# Altium PCB SmartSequins9.1.PcbDoc
Units mm, origin at the board's own origin, x right, y up, seen from the top; angles counter-clockwise.
Board outline 25.01 x 25.01 mm, 2 copper layers (Top Layer, Bottom Layer); 40 components, 20 nets, 91 pads, 36 vias.
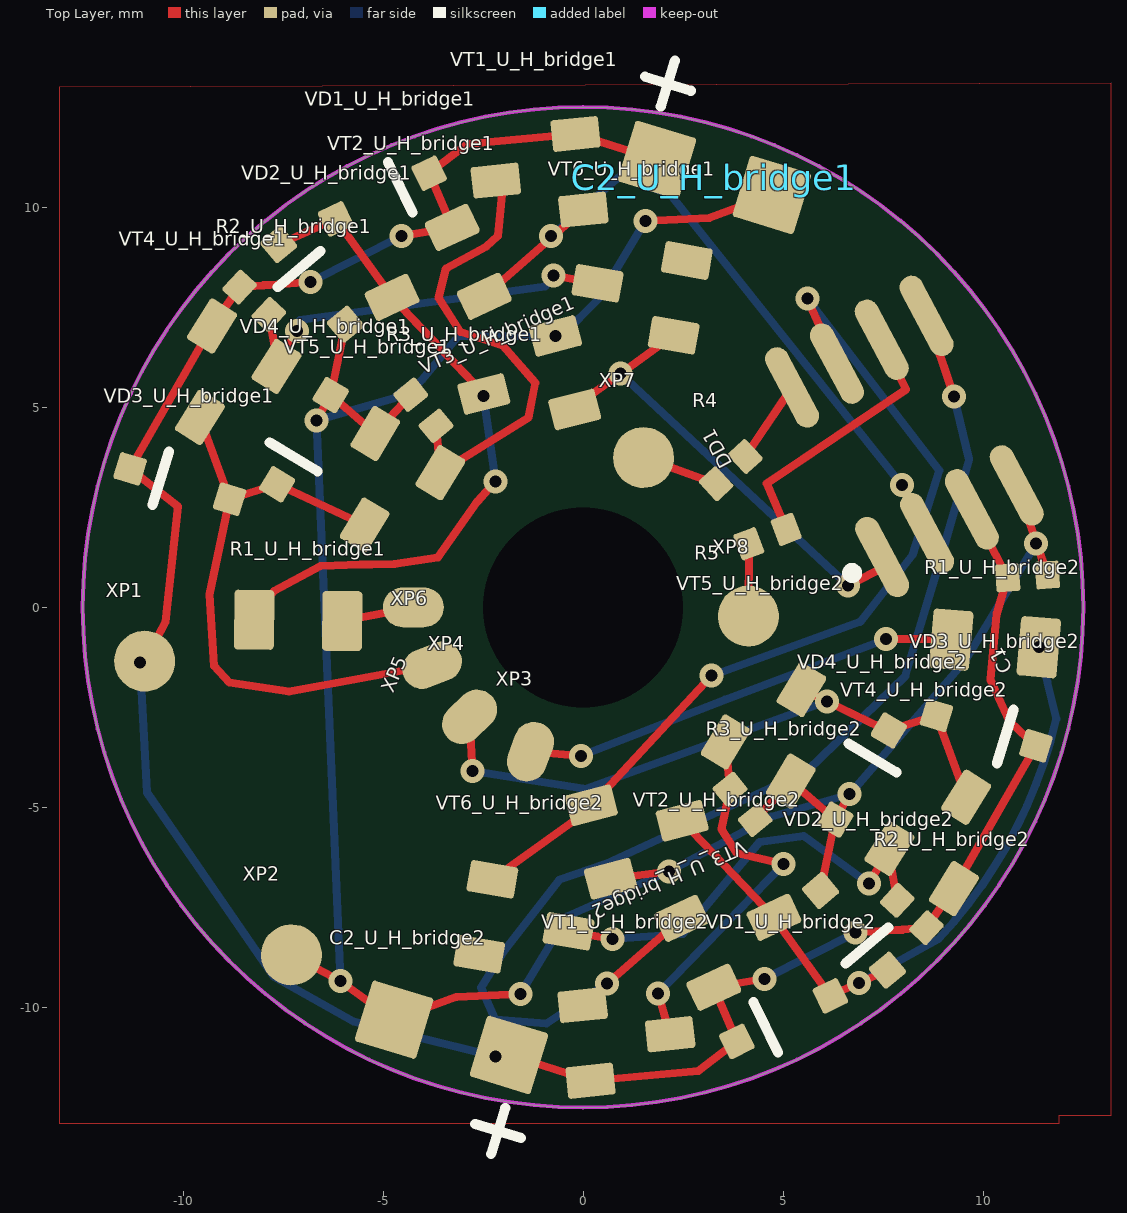
[diagram p0: Top Layer view]
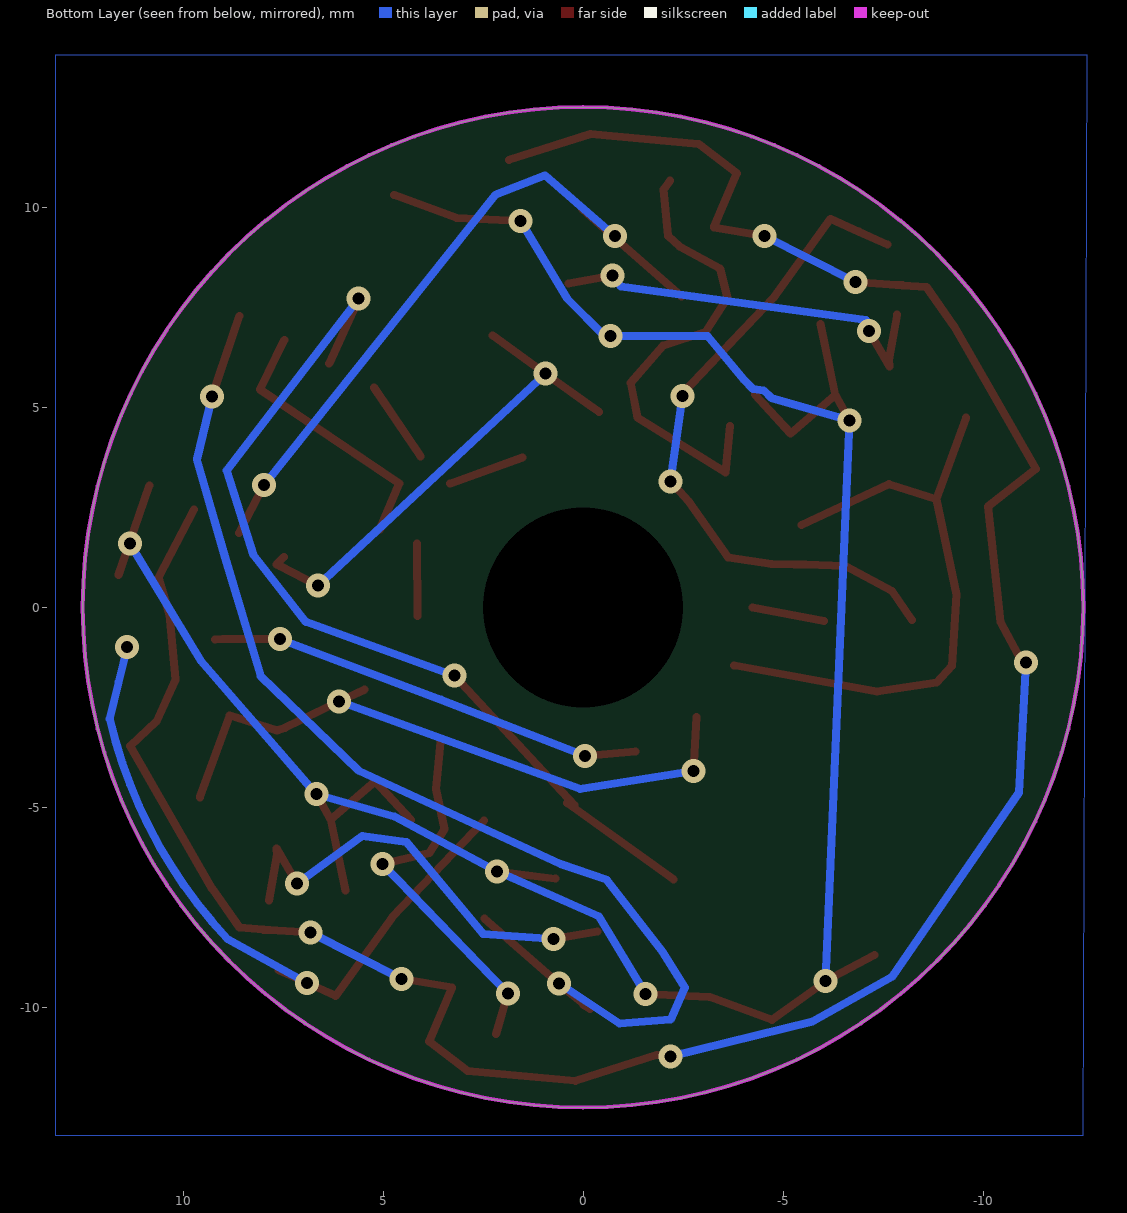
[diagram p1: Bottom Layer view, seen from below]
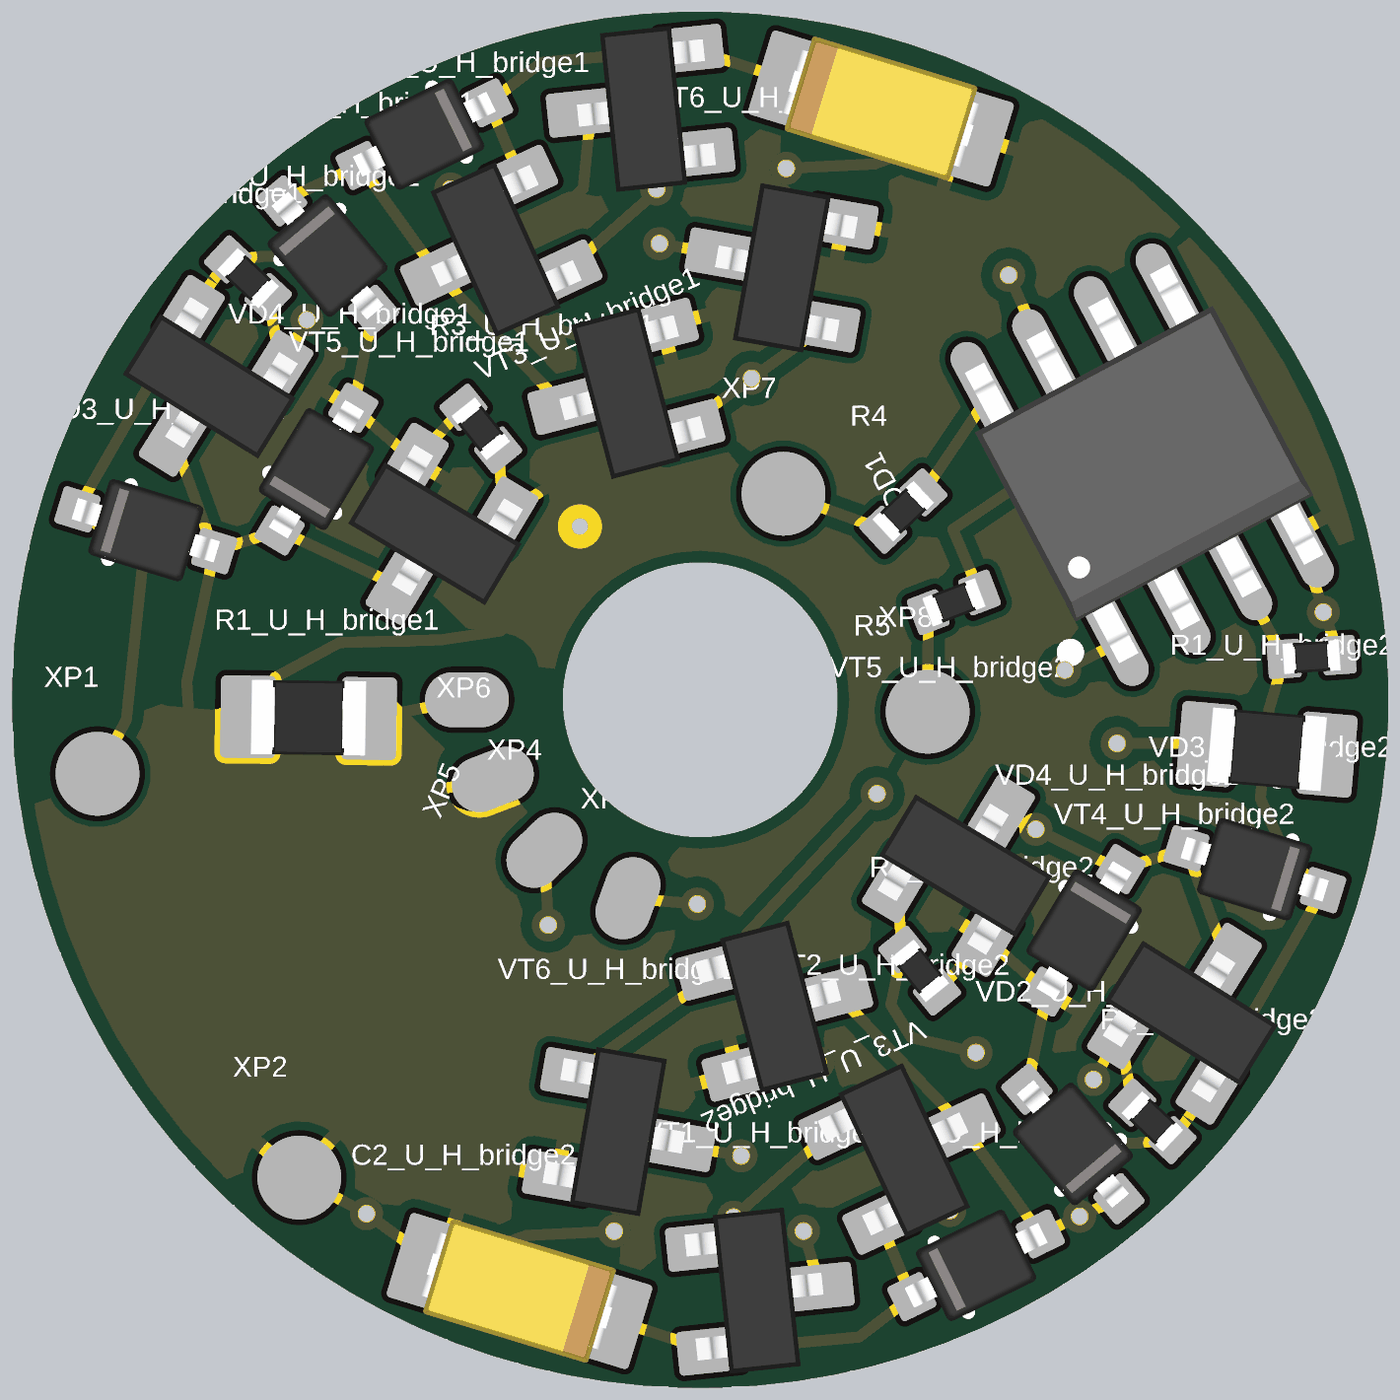
[diagram p2: 3D render of the assembled board from above, using the file's embedded part models]

## Layer stack, top to bottom
Top Solder: solder mask 0.0102, Solder Resist, Dk 3.5
Top Layer: signal copper 0.0356
Dielectric 1: dielectric 0.32, FR-4, Dk 4.8
Bottom Layer: signal copper 0.0356
Bottom Solder: solder mask 0.0102, Solder Resist, Dk 3.5

## Board outline
-12.507,0 ccw(c0,0) 0,-12.507 ccw(c0,0) 12.507,0 ccw(c0,0) 0,12.507 ccw(c0,0)

## Design rules (kind name [scope] priority, off if disabled: settings)
Clearance [All] p1: gap=0.2 ignorepadtopadclearanceinfootprint=FALSE
PolygonConnect [All] p1: thpad.connectstyle=Relief thpad.reliefconductorwidth=0.254 thpad.reliefentries=4 thpad.polygonreliefangle="90 Angle" thpad.airgapwidth=0.254 smdpad.connectstyle=Relief smdpad.reliefconductorwidth=0.254 smdpad.reliefentries=4 smdpad.polygonreliefangle="90 Angle" smdpad.airgapwidth=0.254 via.connectstyle=Direct via.reliefconductorwidth=0.254 via.reliefentries=4 via.polygonreliefangle="90 Angle" via.airgapwidth=0.254
RoutingVias [All] p1: holewidth=0.3 width=0.6 viastyle="Through Hole" minholewidth=0.3 minwidth=0.6 maxholewidth=0.3 maxwidth=0.6
SolderMaskExpansion [All] p1: expansion=0.102 istentingtop=FALSE
Width [All] p1: maxlimit=0.2 minlimit=0.2 preferedwidth=0.2
30 further rules are at their usual default settings.

## Classes and differential pairs
channel class H_bridge: U_H_bridge1 U_H_bridge2
component class U_MCU: C1 DD1 R4 R5 XP7 XP8
component class U_H_bridge2: C2_U_H_bridge2 R1_U_H_bridge2 R2_U_H_bridge2 R3_U_H_bridge2 VD1_U_H_bridge2 VD2_U_H_bridge2 VD3_U_H_bridge2 VD4_U_H_bridge2 VT1_U_H_bridge2 VT2_U_H_bridge2 VT3_U_H_bridge2 VT4_U_H_bridge2 VT5_U_H_bridge2 VT6_U_H_bridge2
component class U_H_bridge1: C2_U_H_bridge1 R1_U_H_bridge1 R2_U_H_bridge1 R3_U_H_bridge1 VD1_U_H_bridge1 VD2_U_H_bridge1 VD3_U_H_bridge1 VD4_U_H_bridge1 VT1_U_H_bridge1 VT2_U_H_bridge1 VT3_U_H_bridge1 VT4_U_H_bridge1 VT5_U_H_bridge1 VT6_U_H_bridge1
component class SmartSequins9.1: XP1 XP2 XP3 XP4 XP5 XP6

## Components (designator, comment, footprint, x,y, rotation, side; value= is the part's Value field where it differs from the comment)
C1 "0,1uF" SMD0402(1608) 11.113,0.777 r4 top
C2_U_H_bridge1 "10uF x 10V" TANT_CAP_A(3216) 3.286,10.749 r343 top (schematic designator C2)
C2_U_H_bridge2 "10uF x 10V" TANT_CAP_A(3216) -3.286,-10.749 r163 top (schematic designator C2)
DD1 "PFC161-S08B" SOIC8 8.07,4.291 r118 top
R1_U_H_bridge1 "10" SMD0805(2012) -7.121,-0.325 r179.21 top (schematic designator R1)
R1_U_H_bridge2 "10" SMD0805(2012) 10.301,-0.901 r355 top (schematic designator R1)
R2_U_H_bridge1 "20к" SMD0402(1608) -8.22,7.666 r317 top (schematic designator R2)
R2_U_H_bridge2 "20к" SMD0402(1608) 8.22,-7.666 r137 top (schematic designator R2)
R3_U_H_bridge1 "20к" SMD0402(1608) -3.99,4.927 r129 top (schematic designator R3)
R3_U_H_bridge2 "20к" SMD0402(1608) 3.99,-4.927 r309 top (schematic designator R3)
R4 "200" SMD0402(1608) 3.692,3.431 r222.9 top
R5 "200" SMD0402(1608) 4.612,1.77 r201 top
VD1_U_H_bridge1 "Value" SOD323 -5.015,10.282 r26 top (schematic designator VD1)
VD1_U_H_bridge2 "Value" SOD323 5.015,-10.282 r206 top (schematic designator VD1)
VD2_U_H_bridge1 "Value" SOD323 -6.775,8.074 r130 top (schematic designator VD2)
VD2_U_H_bridge2 "Value" SOD323 6.775,-8.074 r310 top (schematic designator VD2)
VD3_U_H_bridge1 "Value" SOD323 -10.079,3.082 r163 top (schematic designator VD3)
VD3_U_H_bridge2 "Value" SOD323 10.079,-3.082 r343 top (schematic designator VD3)
VD4_U_H_bridge1 "Value" SOD323 -6.977,4.192 r239 top (schematic designator VD4)
VD4_U_H_bridge2 "Value" SOD323 6.977,-4.192 r59 top (schematic designator VD4)
VT1_U_H_bridge1 "IRLML2244TRPBF" SOT23-3 -1.133,10.781 r186 top (schematic designator VT1)
VT1_U_H_bridge2 "IRLML2244TRPBF" SOT23-3 1.133,-10.781 r6 top (schematic designator VT1)
VT2_U_H_bridge1 "IRLML2244TRPBF" SOT23-3 -3.82,8.193 r205 top (schematic designator VT2)
VT2_U_H_bridge2 "IRLML2244TRPBF" SOT23-3 3.82,-8.193 r25 top (schematic designator VT2)
VT3_U_H_bridge1 "IRLML0040TRPBF" SOT23-3 -1.464,5.6 r194.65 top (schematic designator VT3)
VT3_U_H_bridge2 "IRLML0040TRPBF" SOT23-3 1.464,-5.6 r14.65 top (schematic designator VT3)
VT4_U_H_bridge1 "IRLML2244TRPBF" SOT23-3 -9.023,5.638 r238 top (schematic designator VT4)
VT4_U_H_bridge2 "IRLML2244TRPBF" SOT23-3 9.023,-5.638 r58 top (schematic designator VT4)
VT5_U_H_bridge1 "IRLML0040TRPBF" SOT23-3 -4.92,2.956 r239 top (schematic designator VT5)
VT5_U_H_bridge2 "IRLML0040TRPBF" SOT23-3 4.92,-2.956 r59 top (schematic designator VT5)
VT6_U_H_bridge1 "IRLML0040TRPBF" SOT23-3 1.396,7.918 r170 top (schematic designator VT6)
VT6_U_H_bridge2 "IRLML0040TRPBF" SOT23-3 -1.396,-7.918 r350 top (schematic designator VT6)
XP1 "+5V" XP_solder#1 -10.958,-1.345 r187 top
XP2 "GND" XP_solder#1 -7.289,-8.687 r320 top
XP3 "A+" XP_solder#2 -1.313,-3.608 r70 top
XP4 "A-" XP_solder#2 -2.834,-2.737 r44 top
XP5 "B+" XP_solder#2 -4.24,0 r0 top
XP6 "B-" XP_solder#2 -3.772,-1.448 r21 top
XP7 "IN" XP_solder#1 1.513,3.746 r158 top
XP8 "OUT" XP_solder#1 4.134,-0.217 r87 top

## Footprints (in the part's own frame and the unit in brackets; to place one, negate y for a bottom-side part, rotate by r counter-clockwise, add the part's x,y. Pads: shape width x height; smd on the part's side, far side on the other; paste and mask are expansions set on the pad)
SMD0402(1608) [mm] "Chip Resistor, Body 0.6x0.3mm, IPC Medium Density"
  rrect20% 0.6x0.7 smd: 1(-0.5,0) 2(0.5,0)
  body extent -0.52,-0.27 0.53,0.27, height 0.4
SMD0805(2012) [mm] "Chip Resistor, Body 0.6x0.3mm, IPC Medium Density"
  rrect20% 1x1.5 smd: 1(-1.1,0) 2(1.1,0)
  body extent -1.05,-0.68 1.05,0.67, height 0.6
SOD323 [mm] "Chip Resistor, Body 0.6x0.3mm, IPC Medium Density"
  rrect20% 0.7x0.7 smd: 1(-1.3,0) 2(1.3,0)
  silkscreen extent 0.5,-0.7 0.5,0.7, body extent -1.35,-0.72 1.35,0.73, height 1.15
SOIC8 [mm]
  oval 2.2x0.6 smd: 1(-2.4,1.945) 2(-2.4,0.675) 3(-2.4,-0.595) 4(-2.4,-1.865) 5(2.4,-1.865) 6(2.4,-0.595) 7(2.4,0.675) 8(2.4,1.945)
  silkscreen extent -2.52,2.67 -2.27,2.92, body extent -2.99,-2.45 2.99,2.45, height 1.35
SOT23-3 [mm]
  rrect20% 1.2x0.8 smd: 1(-1.05,0.95) 2(-1.05,-0.95) 3(1.05,0)
  body extent -1.3,-1.4 1.1,1.5, height 1
TANT_CAP_A(3216) [mm]
  rrect10% 1.6x1.6 smd: 1(-1.5,0) 2(1.5,0)
  silkscreen extent -2.4,1.3 -1.2,2.5, body extent -1.7,-0.9 1.7,0.9, height 1.8
XP_solder#1 [mil]
  round 60 smd: 1(0,0)
XP_solder#2 [mil]
  oval 60x39.37 smd: 1(0,0)

## Part data
C1: Package=SMD0402, ValueBOM="Конденсатор керамический 0,1мкФ х 50В SMD 0402 1%", Type=C
C2_U_H_bridge1 C2_U_H_bridge2: Package="SMD A", ValueBOM="Конденсатор танталовый 10мкФ х 10В SMD A", Type=C
DD1: Package=SOIC-8, ValueBOM="Микроконтроллер PFC161-S08B, SOIC-8", Type=DD
R1_U_H_bridge1 R1_U_H_bridge2: Package=SMD0805, ValueBOM="Резистор 10 Ом SMD 0805 1%", Type=R
R2_U_H_bridge1 R2_U_H_bridge2 R3_U_H_bridge1 R3_U_H_bridge2: Package=SMD0402, ValueBOM="Резистор 20кОм SMD 0402 1%", Type=R
R4 R5: Package=SMD0402, ValueBOM="Резистор 200Ом SMD 0402 1%", Type=R
VD1_U_H_bridge1 VD1_U_H_bridge2 VD2_U_H_bridge1 VD2_U_H_bridge2 VD3_U_H_bridge1 VD3_U_H_bridge2 VD4_U_H_bridge1 VD4_U_H_bridge2: Package=SOD323, ValueBOM="Диод Шоттки SOD323", Type=VD
VT1_U_H_bridge1 VT1_U_H_bridge2 VT2_U_H_bridge1 VT2_U_H_bridge2 VT4_U_H_bridge1 VT4_U_H_bridge2: library part VT_P_MOSFET_SOT23_3, Package=SOT-23, ValueBOM="Транзистор p-МОП IRLML2244TRPBF SOT23", Type=VT
VT3_U_H_bridge1 VT3_U_H_bridge2 VT5_U_H_bridge1 VT5_U_H_bridge2 VT6_U_H_bridge1 VT6_U_H_bridge2: library part VT_N_MOSFET_SOT23_3, Package=SOT-23, ValueBOM="Транзистор n-МОП IRLML0040TRPBF SOT23", Type=VT
XP1 XP2 XP3 XP4 XP5 XP6 XP7 XP8: library part XP_solder

## Free pads (board coordinates)
  round 1.524 hole 5 unplated: 18(0,0)

## Via types
v1: diameter 0.6, hole 0.3, Top Layer to Bottom Layer, tented both sides, 34 vias
v2: diameter 0.6, hole 0.3, Top Layer to Bottom Layer, 2 vias

## Nets (pads, with @x,y where several pads share a name; then routed paths per layer and width w, separated by ;. In a path a pad name is that pad's centre, name@x,y a point inside that pad or via, vN(x,y) a via of type N, cw(c..) or ccw(c..) an arc to the next point about the centre after c; other vN are vias at no path point)
GND_B_U_H_bridge1: C1.2 C2_U_H_bridge1.2 C2_U_H_bridge2.2 DD1.4 R3_U_H_bridge1.2 R3_U_H_bridge2.2 VD2_U_H_bridge1.1 VD2_U_H_bridge2.1 VD4_U_H_bridge1.1 VD4_U_H_bridge2.1 VT3_U_H_bridge1.2 VT3_U_H_bridge2.2 VT5_U_H_bridge1.2 VT5_U_H_bridge2.2 VT6_U_H_bridge1.2 VT6_U_H_bridge2.2 XP2.1 | length 66.4
  Top Layer w0.2: XP2.1 v1(-6.067,-9.343) C2_U_H_bridge2.2 -3.164,-9.739 v1(-1.563,-9.661) ; v1(-6.668,4.669) VD4_U_H_bridge1.1 ; VD2_U_H_bridge1.1 VD4_U_H_bridge1.1 ; R3_U_H_bridge1.2 VT5_U_H_bridge1.2 VD4_U_H_bridge1.1 ; VT3_U_H_bridge2.2 v1(2.145,-6.6) ; v1(1.563,9.661) 3.164,9.739 C2_U_H_bridge1.2 ; R3_U_H_bridge2.2 VT5_U_H_bridge2.2 VD4_U_H_bridge2.1 ; VD2_U_H_bridge2.1 VD4_U_H_bridge2.1 ; v1(6.668,-4.669) VD4_U_H_bridge2.1 ; DD1.4 11.342,1.597 C1.2
  Bottom Layer w0.2: v1(-6.067,-9.343) v1(-6.668,4.669) -4.711,5.232 -4.517,5.426 -4.252,5.462 -4.017,5.696 -3.111,6.785 v1(-0.688,6.785) -0.54,6.785 0.405,7.729 v1(1.563,9.661) ; v1(-1.563,-9.661) -0.405,-7.729 v1(2.145,-6.6) 4.711,-5.232 v1(6.668,-4.669) 9.546,-1.342 v1(11.329,1.592)
MCU_VCC: C1.1 C2_U_H_bridge1.1 C2_U_H_bridge2.1 DD1.3 R2_U_H_bridge1.1 R2_U_H_bridge2.1 VD1_U_H_bridge1.2 VD1_U_H_bridge2.2 VD3_U_H_bridge1.2 VD3_U_H_bridge2.2 VT1_U_H_bridge1.2 VT1_U_H_bridge2.2 VT2_U_H_bridge1.2 VT2_U_H_bridge2.2 VT4_U_H_bridge1.2 VT4_U_H_bridge2.2 XP1.1 | length 64.1
  Top Layer w0.2: XP1.1 -10.434,-0.364 -10.13,2.526 VD3_U_H_bridge1.2 VT4_U_H_bridge1.2 R2_U_H_bridge1.1 -7.993,8.049 -7.982,8.06 -7.838,8.06 v1(-6.813,8.134) ; v1(-4.536,9.285) VT2_U_H_bridge1.2 VD1_U_H_bridge1.2 -2.889,11.585 VT1_U_H_bridge1.2 C2_U_H_bridge1.1 ; v1(-2.183,-11.23) C2_U_H_bridge2.1 VT1_U_H_bridge2.2 2.889,-11.585 VD1_U_H_bridge2.2 VT2_U_H_bridge2.2 v1(4.536,-9.285) ; v1(6.813,-8.134) 7.838,-8.06 7.982,-8.06 7.993,-8.049 R2_U_H_bridge2.1 VT4_U_H_bridge2.2 VD3_U_H_bridge2.2 10.664,-2.857 10.183,-1.796 10.338,-0.18 C1.1 DD1.3
  Bottom Layer w0.2: v1(-11.078,-1.384) -10.899,-4.626 -7.739,-9.223 -5.74,-10.355 v1(-2.183,-11.23) ; v1(-6.813,8.134) v1(-4.536,9.285) ; v1(4.536,-9.285) v1(6.813,-8.134)
NetDD1_1: DD1.1 VT3_U_H_bridge1.1 VT6_U_H_bridge1.1 | length 12.5
  Top Layer w0.2: VT3_U_H_bridge1.1@-0.396,4.888 -0.244,4.997 v1(0.934,5.844) VT6_U_H_bridge1.1 ; v1(6.625,0.54) 7.593,1.04 7.665,1.077 DD1.1
  Bottom Layer w0.2: v1(0.934,5.844) v1(6.625,0.54)
NetDD1_2: DD1.2 VT1_U_H_bridge1.1 VT2_U_H_bridge1.1 | length 17.6
  Top Layer w0.2: VT2_U_H_bridge1.1 -0.774,9.259 VT1_U_H_bridge1.1 ; v1(7.973,3.06) DD1.2
  Bottom Layer w0.2: v1(-0.795,9.283) 0.945,10.799 2.191,10.31 v1(7.973,3.06)
NetDD1_5: DD1.5 VT1_U_H_bridge2.1 VT2_U_H_bridge2.1 | length 30.6
  Top Layer w0.2: VT1_U_H_bridge2.1 -0.175,-10.038 -0.03,-9.921 v1(0.605,-9.406) VT2_U_H_bridge2.1 ; DD1.5 v1(9.275,5.266)
  Bottom Layer w0.2: v1(0.605,-9.406) 0.599,-9.4 -0.91,-10.4 -2.191,-10.31 -2.547,-9.505 -1.989,-8.613 -0.596,-6.814 0.561,-6.415 5.615,-4.079 8.06,-1.713 8.952,1.258 9.653,3.706 v1(9.275,5.266)
NetDD1_6: DD1.6 R5.1 | length 6.8
  Top Layer w0.2: R5.1 4.593,3.098 8.075,5.447 DD1.6
NetDD1_7: DD1.7 VT3_U_H_bridge2.1 VT6_U_H_bridge2.1 | length 23.6
  Top Layer w0.2: VT6_U_H_bridge2.1 0.244,-4.997 VT3_U_H_bridge2.1@0.396,-4.888 ; VT3_U_H_bridge2.1 v1(3.214,-1.709) ; v1(5.607,7.718) 5.529,7.897 5.61,7.719 DD1.7
  Bottom Layer w0.2: v1(3.214,-1.709) 6.93,-0.363 8.237,1.305 8.906,3.419 v1(5.607,7.718)
NetDD1_8: DD1.8 R4.1 | length 2.1
  Top Layer w0.2: R4.1 DD1.8
NetR1_U_H_bridge1_1: R1_U_H_bridge1.1 XP5.1 | length 1.8
  Top Layer w0.2: R1_U_H_bridge1.1 XP5.1
NetR1_U_H_bridge1_2: R1_U_H_bridge1.2 VD1_U_H_bridge1.1 VD2_U_H_bridge1.2 VT2_U_H_bridge1.3 VT3_U_H_bridge1.3 | length 17
  Top Layer w0.2: R1_U_H_bridge1.2 -7.729,0.405 -6.558,1.039 -5.56,1.066 -5.297,1.066 -5.29,1.073 -4.716,1.089 -3.631,1.25 -2.645,2.645 v2(-2.188,3.15) ; VD2_U_H_bridge1.2 -6.897,9.391 VD1_U_H_bridge1.1 VT2_U_H_bridge1.3 VT3_U_H_bridge1.3
  Bottom Layer w0.2: v2(-2.491,5.285) v2(-2.188,3.15)
NetR1_U_H_bridge2_1: R1_U_H_bridge2.1 XP3.1 | length 11.1
  Top Layer w0.2: XP3.1 v1(-0.053,-3.713) ; v1(7.579,-0.794) 9.006,-0.788 R1_U_H_bridge2.1
  Bottom Layer w0.2: v1(-0.053,-3.713) 3.556,-2.309 v1(7.579,-0.794)
NetR1_U_H_bridge2_2: R1_U_H_bridge2.2 VD1_U_H_bridge2.1 VD2_U_H_bridge2.2 VT2_U_H_bridge2.3 VT3_U_H_bridge2.3 | length 17.7
  Top Layer w0.2: VT3_U_H_bridge2.3 VT2_U_H_bridge2.3 VD1_U_H_bridge2.1 v1(6.897,-9.391) VD2_U_H_bridge2.2
  Bottom Layer w0.2: v1(6.897,-9.391) 8.891,-8.291 ccw(c0,0) 11.834,-2.786 11.608,-1.864 v1(11.396,-0.997)
NetR2_U_H_bridge1_2: R2_U_H_bridge1.2 VT4_U_H_bridge1.1 VT6_U_H_bridge1.3 | length 10.3
  Top Layer w0.2: R2_U_H_bridge1.2 -7.647,6.193 VT4_U_H_bridge1.1 v1(-7.15,6.905) ; v1(-0.742,8.292) VT6_U_H_bridge1.3
  Bottom Layer w0.2: v1(-7.15,6.905) -7.058,7.026 -7.08,7.182 -0.947,8.022 v1(-0.742,8.292)
NetR2_U_H_bridge2_2: R2_U_H_bridge2.2 VT4_U_H_bridge2.1 VT6_U_H_bridge2.3 | length 11.3
  Top Layer w0.2: VT6_U_H_bridge2.3 v1(0.742,-8.292) ; v1(7.15,-6.905) VT4_U_H_bridge2.1 7.647,-6.193 R2_U_H_bridge2.2
  Bottom Layer w0.2: v1(0.742,-8.292) 2.497,-8.167 4.417,-5.862 5.516,-5.712 v1(7.15,-6.905)
NetR3_U_H_bridge1_1: R3_U_H_bridge1.1 VT1_U_H_bridge1.3 VT5_U_H_bridge1.1 | length 11.8
  Top Layer w0.2: R3_U_H_bridge1.1 VT5_U_H_bridge1.1 -1.362,4.749 -1.193,5.615 -2,6.541 -3.067,6.888 -3.609,7.74 -3.424,8.474 -2.417,9.022 -2.128,9.288 -2.015,10.448 VT1_U_H_bridge1.3
NetR3_U_H_bridge2_1: R3_U_H_bridge2.1 VT1_U_H_bridge2.3 VT5_U_H_bridge2.1 | length 9.7
  Top Layer w0.2: v1(1.878,-9.659) VT1_U_H_bridge2.3 ; VT5_U_H_bridge2.1 R3_U_H_bridge2.1 3.466,-5.546 3.837,-6.14 v1(5.011,-6.414)
  Bottom Layer w0.2: v1(1.878,-9.659) v1(5.011,-6.414)
NetR4_2: R4.2 XP7.1 | length 1.9
  Top Layer w0.2: XP7.1 R4.2
NetR5_2: R5.2 XP8.1 | length 1.8
  Top Layer w0.2: XP8.1 R5.2
NetVD3_U_H_bridge1_1: VD3_U_H_bridge1.1 VD4_U_H_bridge1.2 VT4_U_H_bridge1.3 VT5_U_H_bridge1.3 XP6.1 | length 15.8
  Top Layer w0.2: VT4_U_H_bridge1.3 VD3_U_H_bridge1.1 ; VT5_U_H_bridge1.3 VD4_U_H_bridge1.2 VD3_U_H_bridge1.1 ; XP6.1 -7.344,-2.106 -8.842,-1.88 -9.225,-1.461 -9.334,0.326 VD3_U_H_bridge1.1
NetVD3_U_H_bridge2_1: VD3_U_H_bridge2.1 VD4_U_H_bridge2.2 VT4_U_H_bridge2.3 VT5_U_H_bridge2.3 XP4.1 | length 16.5
  Top Layer w0.2: XP4.1 v1(-2.762,-4.095) ; VT5_U_H_bridge2.3 v1(6.1,-2.355) 7.455,-3.012 7.647,-3.078 VD3_U_H_bridge2.1 VT4_U_H_bridge2.3
  Bottom Layer w0.2: v1(-2.762,-4.095) 0.079,-4.539 6.097,-2.347 6.106,-2.344 v1(6.1,-2.355)

## Polygon pours and split planes (outlines as drawn)
GND_B_U_H_bridge1 on Top Layer "NONET_L-01_P-001" (solid, remove dead copper, shelved, pour order 1): -13.1,13 -13.1,-12.9 11.9,-12.9 11.9,-12.7 13.2,-12.7 13.2,13.1
no net on Top Layer "NONET_L-01_P-001" (solid, shelved, pour order 0): -12.2,12.9
GND_B_U_H_bridge1 on Bottom Layer "NONET_L-01_P-001" (solid, remove dead copper, shelved, pour order 2): -12.6,13.8 13.2,13.8 13.2,-13.2 -12.5,-13.2

## Keep-outs
Keep-Out Layer:
  circle w0.1: c0,0 r12.507